# EAGLE board out8 (EAGLE 6.2)
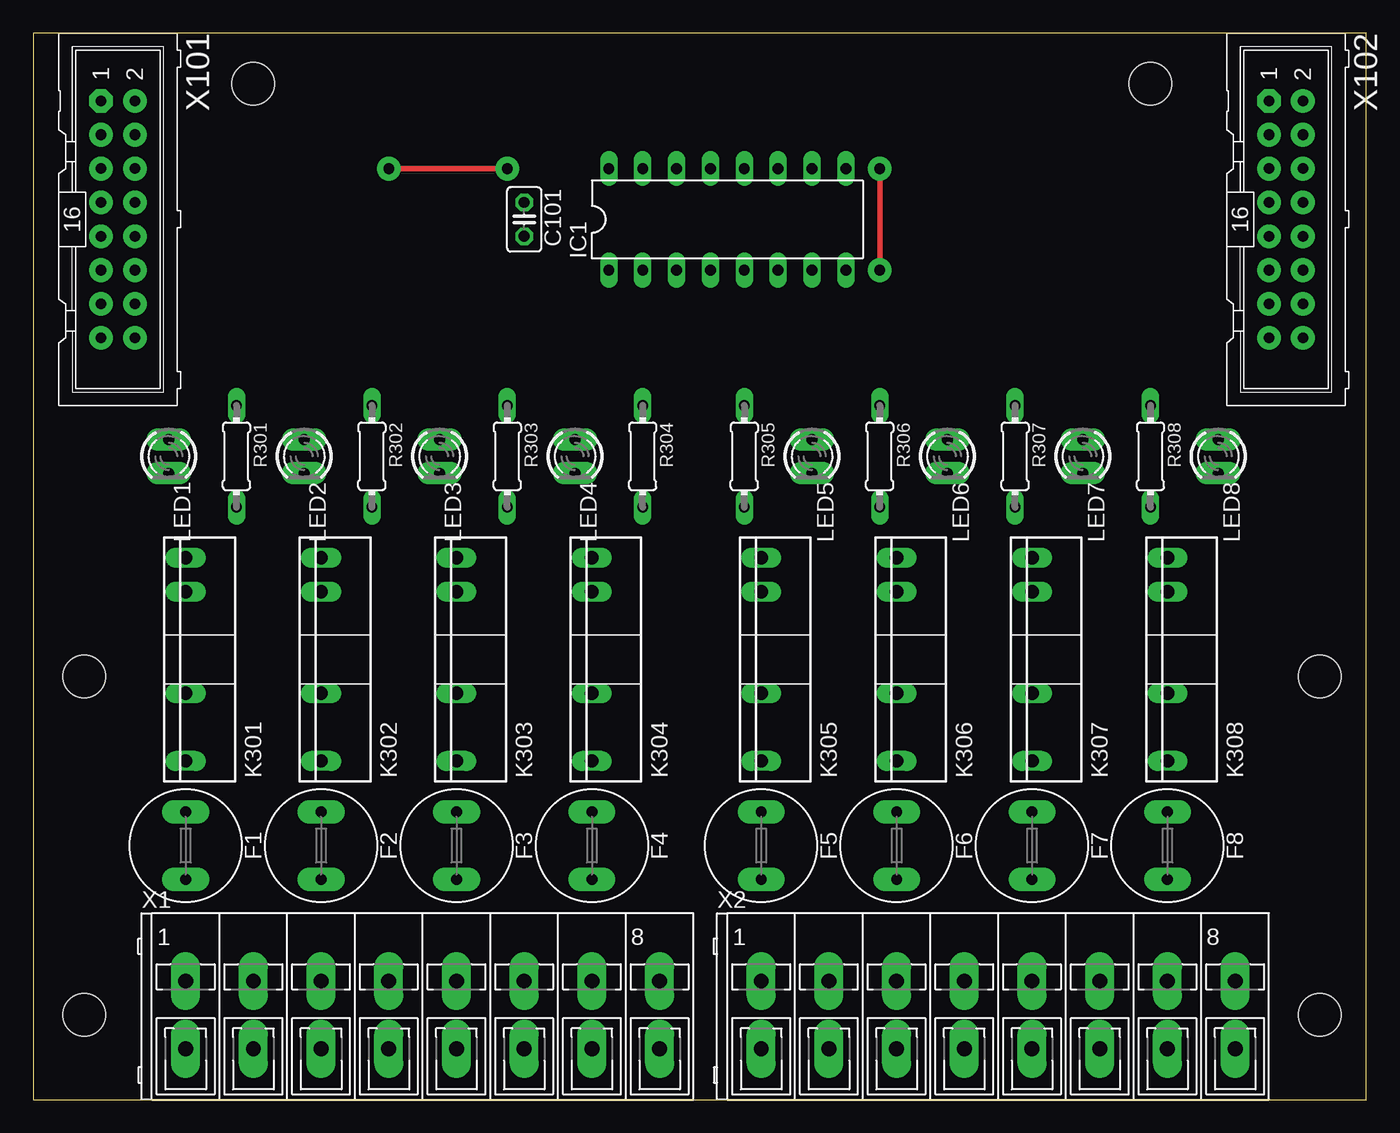
[diagram p0: board, top side]
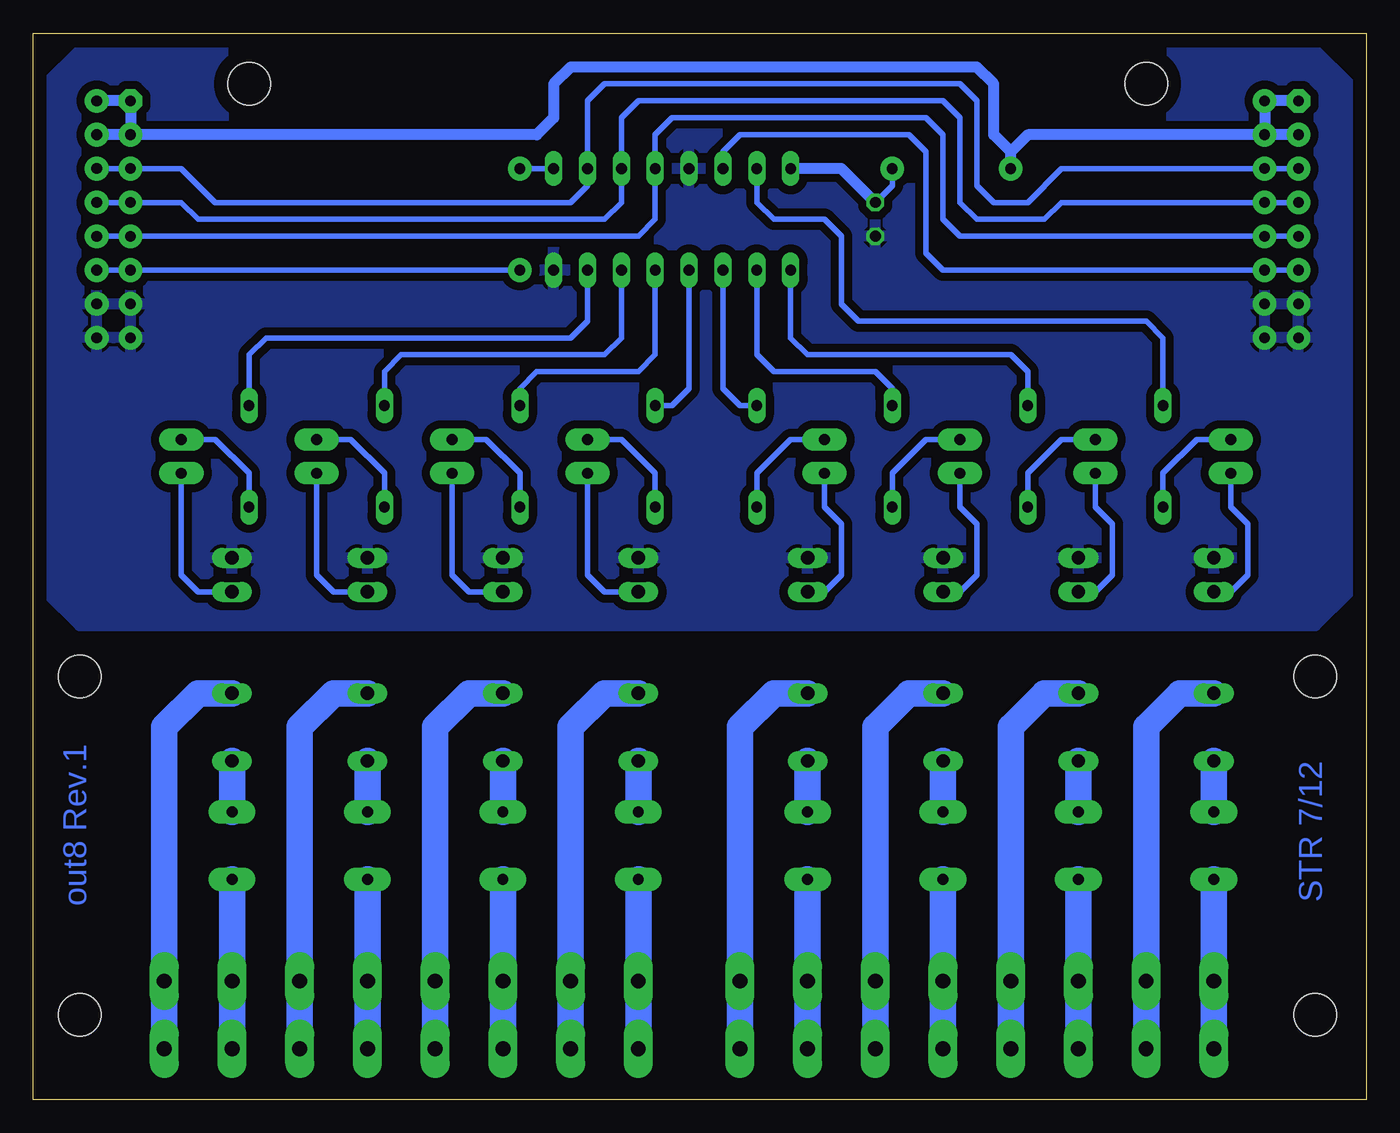
[diagram p1: board, bottom side, seen from below]

Size 100 x 80 mm. Coordinates in mm from the lower left corner, seen from the top.
Outline: 0,0 100,0 100,80 0,80 0,0
Copper layers (1*16): Top 0.035mm / dielectric 1.5mm / Bottom 0.035mm
Design rules: minimum track width 10mil, minimum drill 24mil, track to track 8mil, track to pad 8mil, pad to pad 8mil, via to via 8mil, smd to smd 8mil, copper to edge 40mil, drill to drill 8mil, minimum pad ring 10mil, minimum via ring 8mil, stop-mask expansion 4mil, vias tented up to drill 0mil, thermal gap 10mil
Holes 3.2 mm at 16.51,76.2 83.82,76.2 3.81,6.35 96.52,6.35 3.81,31.75 96.52,31.75

## Footprints (pad centres in the part's own frame; a part is rotated, then mirrored left to right if it is on the bottom)
C025-025X050 = drill 0.813 octagon: 1 -1.27,0; 2 1.27,0
TR5 = drill 0.813 pad 1.778 long: 1 -2.54,0; 2 2.54,0
DIL16 = drill 0.813 long: 1 -8.89,-3.81; 2 -6.35,-3.81; 3 -3.81,-3.81; 4 -1.27,-3.81; 5 1.27,-3.81; 6 3.81,-3.81; 7 6.35,-3.81; 8 8.89,-3.81; 9 8.89,3.81; 10 6.35,3.81; 11 3.81,3.81; 12 1.27,3.81; 13 -1.27,3.81; 14 -3.81,3.81; 15 -6.35,3.81; 16 -8.89,3.81
SIP4 = drill 1 long: 1 -7.62,0; 2 -2.54,0; 3 5.08,0; 4 7.62,0
LED3MM = drill 0.813 pad 1.676 long: A -1.27,0; K 1.27,0
0204/7 = drill 0.813 long: 1 -3.81,0; 2 3.81,0
WAGO_236-408 = drill 1.118 pad 2.184 long: A1 -17.78,-3.81; A2 -12.7,-3.81; A3 -7.62,-3.81; A4 -2.54,-3.81; A5 2.54,-3.81; A6 7.62,-3.81; A7 12.7,-3.81; A8 17.78,-3.81; B1 -17.78,1.27; B2 -12.7,1.27; B3 -7.62,1.27; B4 -2.54,1.27; B5 2.54,1.27; B6 7.62,1.27; B7 12.7,1.27; B8 17.78,1.27
WS16V = drill 0.8 pad 1.778 octagon: 1 -8.89,-1.27 | drill 0.8 pad 1.778: 2 -8.89,1.27; 3 -6.35,-1.27; 4 -6.35,1.27; 5 -3.81,-1.27; 6 -3.81,1.27; 7 -1.27,-1.27; 8 -1.27,1.27; 9 1.27,-1.27; 10 1.27,1.27; 11 3.81,-1.27; 12 3.81,1.27; 13 6.35,-1.27; 14 6.35,1.27; 15 8.89,-1.27; 16 8.89,1.27

## Placement (x,y rotation side)
C101  100nF  [C025-025X050]  36.83,66.04 270 top
F1  2T  [TR5]  11.43,19.05 270 top
F2  2T  [TR5]  21.59,19.05 270 top
F3  2T  [TR5]  31.75,19.05 270 top
F4  2T  [TR5]  41.91,19.05 270 top
F5  2T  [TR5]  54.61,19.05 270 top
F6  2T  [TR5]  64.77,19.05 270 top
F7  2T  [TR5]  74.93,19.05 270 top
F8  2T  [TR5]  85.09,19.05 270 top
IC1  74HC595N  [DIL16]  52.07,66.04 0 top
K301  S202S02  [SIP4]  11.43,33.02 90 top
K302  S202S02  [SIP4]  21.59,33.02 90 top
K303  S202S02  [SIP4]  31.75,33.02 90 top
K304  S202S02  [SIP4]  41.91,33.02 90 top
K305  S202S02  [SIP4]  54.61,33.02 90 top
K306  S202S02  [SIP4]  64.77,33.02 90 top
K307  S202S02  [SIP4]  74.93,33.02 90 top
K308  S202S02  [SIP4]  85.09,33.02 90 top
LED1  [LED3MM]  10.16,48.26 270 top
LED2  [LED3MM]  20.32,48.26 270 top
LED3  [LED3MM]  30.48,48.26 270 top
LED4  [LED3MM]  40.64,48.26 270 top
LED5  [LED3MM]  58.42,48.26 270 top
LED6  [LED3MM]  68.58,48.26 270 top
LED7  [LED3MM]  78.74,48.26 270 top
LED8  [LED3MM]  88.9,48.26 270 top
R301  180Ω  [0204/7]  15.24,48.26 270 top
R302  180Ω  [0204/7]  25.4,48.26 270 top
R303  180Ω  [0204/7]  35.56,48.26 270 top
R304  180Ω  [0204/7]  45.72,48.26 270 top
R305  180Ω  [0204/7]  53.34,48.26 270 top
R306  180Ω  [0204/7]  63.5,48.26 270 top
R307  180Ω  [0204/7]  73.66,48.26 270 top
R308  180Ω  [0204/7]  83.82,48.26 270 top
X1  [WAGO_236-408]  29.21,7.62 0 top
X2  [WAGO_236-408]  72.39,7.62 0 top
X101  [WS16V]  6.35,66.04 270 top
X102  [WS16V]  93.98,66.04 270 top

## Library data of the parts
C101 R301-R308 = passiv
F1-F8 = sicherung; OC_FARNELL: unknown; OC_NEWARK: unknown
IC1 = 74xx-eu
K301-K308 = relais; VDRM: 600
LED1-LED8 = led
X1 X2 X101 X102 = anschluss

## Nets
!R: IC1.10 X101.5 X101.6 X102.5 X102.6
+5V: C101.1 IC1.16 X101.1 X101.2 X101.3 X101.4 X102.1 X102.2 X102.3 X102.4
C1: IC1.11 X101.7 X101.8 X102.7 X102.8
C2: IC1.12 X101.9 X101.10 X102.9 X102.10
D: IC1.14 X101.11 X101.12
GND: C101.2 IC1.8 IC1.13 K301.4 K302.4 K303.4 K304.4 K305.4 K306.4 K307.4 K308.4 X101.13 X101.14 X101.15 X101.16 X102.13 X102.14 X102.15 X102.16
N$1: IC1.15 R301.1
N$2: IC1.1 R302.1
N$3: IC1.2 R303.1
N$4: IC1.3 R304.1
N$5: IC1.4 R305.1
N$6: IC1.5 R306.1
N$7: IC1.6 R307.1
N$8: IC1.7 R308.1
N$9: F1.1 K301.1
N$10: F1.2 X1.A1 X1.B1
N$11: K301.2 X1.A2 X1.B2
N$12: F2.1 K302.1
N$13: F2.2 X1.A3 X1.B3
N$14: K302.2 X1.A4 X1.B4
N$15: F3.1 K303.1
N$16: F3.2 X1.A5 X1.B5
N$17: K301.3 LED1.K
N$18: K302.3 LED2.K
N$19: K303.3 LED3.K
N$20: K304.3 LED4.K
N$21: K305.3 LED5.K
N$22: K306.3 LED6.K
N$23: K307.3 LED7.K
N$24: K308.3 LED8.K
N$25: K303.2 X1.A6 X1.B6
N$26: F4.1 K304.1
N$27: F4.2 X1.A7 X1.B7
N$28: K304.2 X1.A8 X1.B8
N$29: F5.1 K305.1
N$30: F5.2 X2.A1 X2.B1
N$31: K305.2 X2.A2 X2.B2
N$32: F6.1 K306.1
N$33: F6.2 X2.A3 X2.B3
N$34: K306.2 X2.A4 X2.B4
N$35: F7.1 K307.1
N$36: F7.2 X2.A5 X2.B5
N$37: K307.2 X2.A6 X2.B6
N$38: F8.1 K308.1
N$39: F8.2 X2.A7 X2.B7
N$40: K308.2 X2.A8 X2.B8
N$41: IC1.9 X102.11 X102.12
N$42: LED1.A R301.2
N$43: LED2.A R302.2
N$44: LED3.A R303.2
N$45: LED4.A R304.2
N$46: LED5.A R305.2
N$47: LED6.A R306.2
N$48: LED7.A R307.2
N$49: LED8.A R308.2

## Tracks (layer width: path | path; a pad name or v marks a point on that pad's centre or on a via)
!R
  Bottom 0.406: X101.5 X101.6 22.86,69.85 25.4,67.31 27.94,67.31 29.21,68.58 29.21,74.93 30.48,76.2 57.15,76.2 58.42,74.93 IC1.10 58.42,68.58 59.69,67.31 86.36,67.31 88.9,69.85 X102.5 X102.6
+5V  (via drill 0.8 pad 1.78)
  Top 0.406: v35.56,69.85 v26.67,69.85
  Bottom 0.406: C101.1 35.56,68.58 v35.56,69.85
  Bottom 0.813: C101.1 39.37,69.85 IC1.16 | 26.67,71.12 25.4,72.39 X101.4 | 26.67,71.12 27.94,72.39 27.94,76.2 29.21,77.47 59.69,77.47 60.96,76.2 60.96,73.66 62.23,72.39 X102.3 | v26.67,69.85 26.67,71.12 | X101.3 X101.4 | X101.1 X101.2 X101.4 | X102.3 X102.4 | X102.3 X102.1 X102.2
C1
  Bottom 0.406: X101.7 X101.8 22.86,67.31 24.13,66.04 29.21,66.04 30.48,67.31 30.48,73.66 31.75,74.93 54.61,74.93 55.88,73.66 IC1.11 55.88,67.31 57.15,66.04 87.63,66.04 88.9,67.31 X102.7 X102.8
C2
  Bottom 0.406: X101.9 X101.10 30.48,64.77 31.75,66.04 31.75,72.39 33.02,73.66 52.07,73.66 53.34,72.39 IC1.12 53.34,66.04 54.61,64.77 X102.9 X102.10
D
  Bottom 0.406: X101.11 X101.12 31.75,62.23 33.02,63.5 33.02,71.12 34.29,72.39 46.99,72.39 48.26,71.12 IC1.14
GND
  pour Bottom (isolate 0.61): 3.81,35.56 1.27,38.1 1.27,76.2 3.81,78.74 96.52,78.74 99.06,76.2 99.06,38.1 96.52,35.56
N$1
  Bottom 0.406: R301.1 15.24,57.15 16.51,58.42 38.1,58.42 39.37,59.69 39.37,64.77 40.64,66.04 44.45,66.04 45.72,67.31 IC1.15
N$2
  Bottom 0.406: R302.1 25.4,54.61 26.67,55.88 41.91,55.88 43.18,57.15 IC1.1
N$3
  Bottom 0.406: R303.1 35.56,53.34 36.83,54.61 44.45,54.61 45.72,55.88 IC1.2
N$4
  Bottom 0.406: R304.1 46.99,52.07 48.26,53.34 IC1.3
N$5
  Bottom 0.406: R305.1 52.07,52.07 50.8,53.34 IC1.4
N$6
  Bottom 0.406: R306.1 63.5,53.34 62.23,54.61 54.61,54.61 53.34,55.88 IC1.5
N$7
  Bottom 0.406: R307.1 73.66,54.61 72.39,55.88 57.15,55.88 55.88,57.15 IC1.6
N$8
  Bottom 0.406: R308.1 83.82,55.88 82.55,57.15 59.69,57.15 58.42,58.42 IC1.7
N$9
  Bottom 2: F1.1 K301.1
N$10
  Bottom 2: F1.2 X1.A1
N$11
  Bottom 2: K301.2 13.97,30.48 16.51,27.94 X1.A2
N$12
  Bottom 2: F2.1 K302.1
N$13
  Bottom 2: F2.2 X1.A3
N$14
  Bottom 2: K302.2 24.13,30.48 26.67,27.94 X1.A4
N$15
  Bottom 2: K303.1 F3.1
N$16
  Bottom 2: F3.2 X1.A5
N$17
  Bottom 0.406: LED1.K 10.16,44.45 8.89,43.18 8.89,39.37 10.16,38.1 K301.3
N$18
  Bottom 0.406: LED2.K 20.32,44.45 19.05,43.18 19.05,39.37 20.32,38.1 K302.3
N$19
  Bottom 0.406: LED3.K 30.48,44.45 29.21,43.18 29.21,39.37 30.48,38.1 K303.3
N$20
  Bottom 0.406: LED4.K 40.64,44.45 39.37,43.18 39.37,39.37 40.64,38.1 K304.3
N$21
  Bottom 0.406: LED5.K 58.42,39.37 57.15,38.1 K305.3
N$22
  Bottom 0.406: LED6.K 68.58,39.37 67.31,38.1 K306.3
N$23
  Bottom 0.406: LED7.K 78.74,39.37 77.47,38.1 K307.3
N$24
  Bottom 0.406: LED8.K 88.9,39.37 87.63,38.1 K308.3
N$25
  Bottom 2: K303.2 34.29,30.48 36.83,27.94 X1.A6
N$26
  Bottom 2: F4.1 K304.1
N$27
  Bottom 2: F4.2 X1.A7
N$28
  Bottom 2: K304.2 44.45,30.48 46.99,27.94 X1.A8
N$29
  Bottom 2: K305.1 F5.1
N$30
  Bottom 2: F5.2 X2.A1
N$31
  Bottom 2: K305.2 57.15,30.48 59.69,27.94 X2.A2
N$32
  Bottom 2: K306.1 F6.1
N$33
  Bottom 2: F6.2 X2.A3
N$34
  Bottom 2: K306.2 67.31,30.48 69.85,27.94 X2.A4
N$35
  Bottom 2: K307.1 F7.1
N$36
  Bottom 2: F7.2 X2.A5
N$37
  Bottom 2: K307.2 77.47,30.48 80.01,27.94 X2.A6
N$38
  Bottom 2: F8.1 K308.1
N$39
  Bottom 2: F8.2 X2.A7
N$40
  Bottom 2: K308.2 87.63,30.48 90.17,27.94 X2.A8
N$41  (via drill 0.8 pad 1.78)
  Top 0.406: v63.5,69.85 v63.5,62.23
  Bottom 0.406: X102.12 X102.11 v63.5,62.23 | IC1.9 v63.5,69.85
N$42
  Bottom 0.406: R301.2 15.24,46.99 12.7,49.53 LED1.A
N$43
  Bottom 0.406: R302.2 25.4,46.99 22.86,49.53 LED2.A
N$44
  Bottom 0.406: R303.2 35.56,46.99 33.02,49.53 LED3.A
N$45
  Bottom 0.406: R304.2 45.72,46.99 43.18,49.53 LED4.A
N$46
  Bottom 0.406: LED5.A 55.88,49.53 53.34,46.99 R305.2
N$47
  Bottom 0.406: LED6.A 66.04,49.53 63.5,46.99 R306.2
N$48
  Bottom 0.406: R307.2 73.66,46.99 76.2,49.53 LED7.A
N$49
  Bottom 0.406: R308.2 83.82,46.99 86.36,49.53 LED8.A

## Text on the board
Bottom: out8 Rev.1 | STR 7/12